# Altium PCB acionadorIncendio.PcbDoc
Units mm, origin at the board's own origin, x right, y up, seen from the top; angles counter-clockwise.
Board outline 80 x 47 mm, 2 copper layers (Top Layer, Bottom Layer); 23 components, 16 nets, 60 pads, 71 vias.
Unrouted connection lines stored in the file: 5.
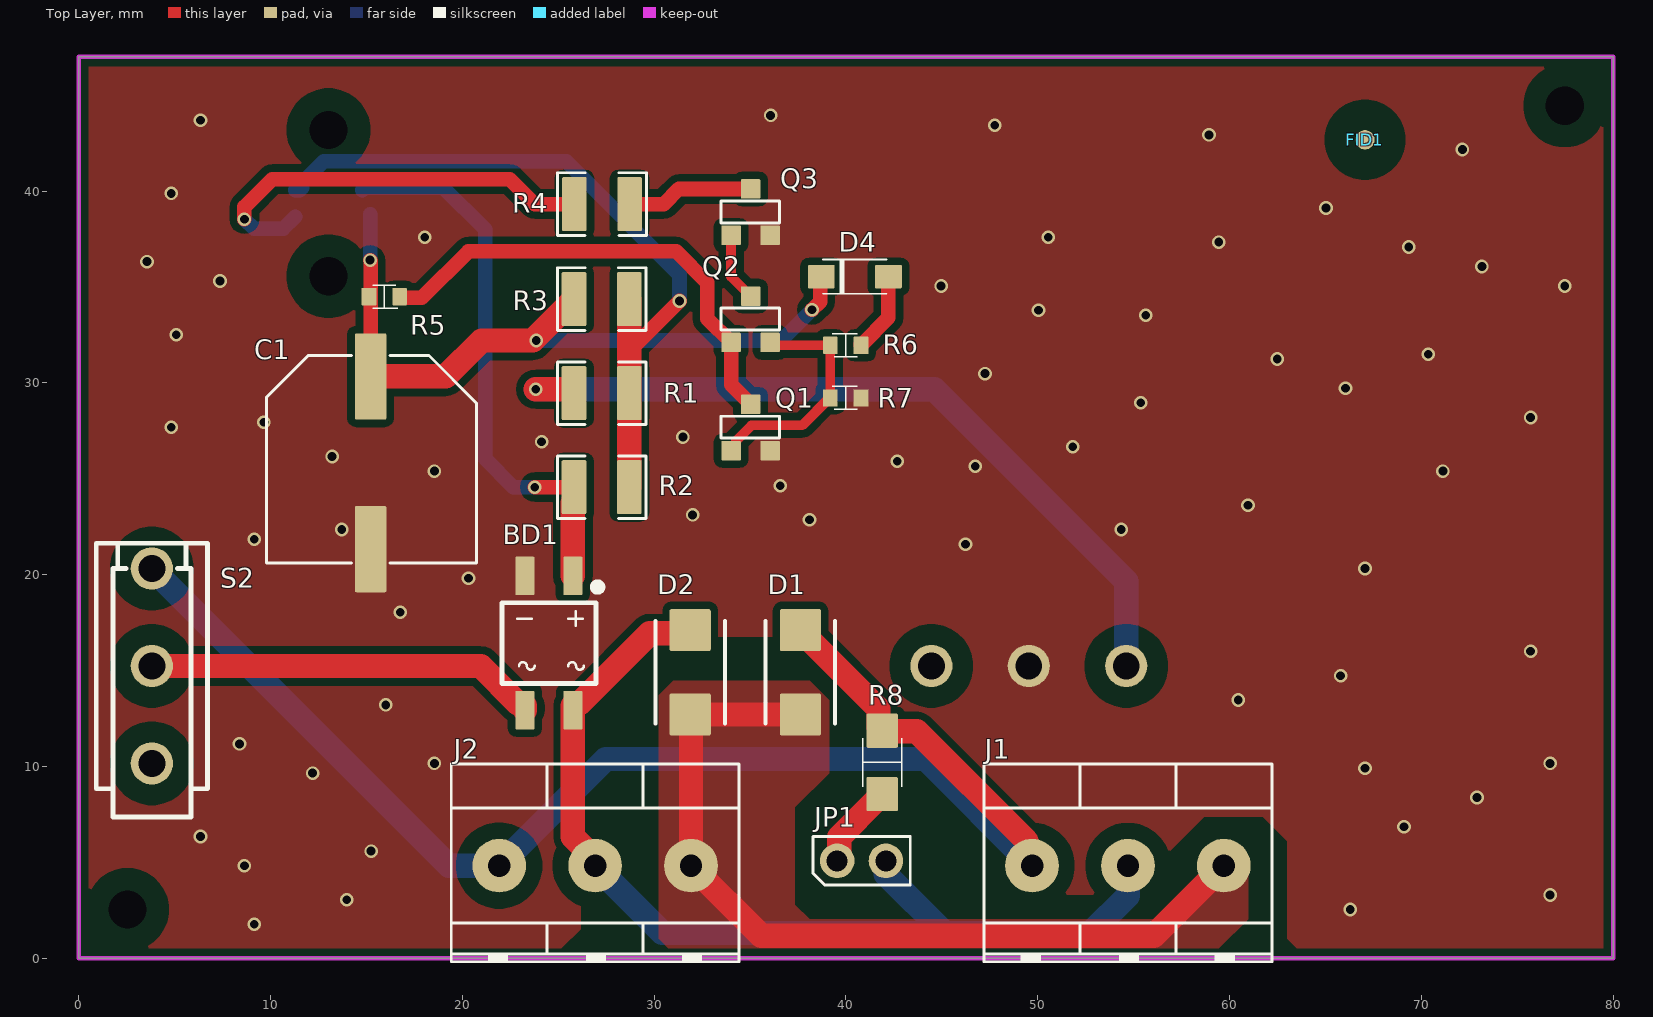
[diagram p0: Top Layer view]
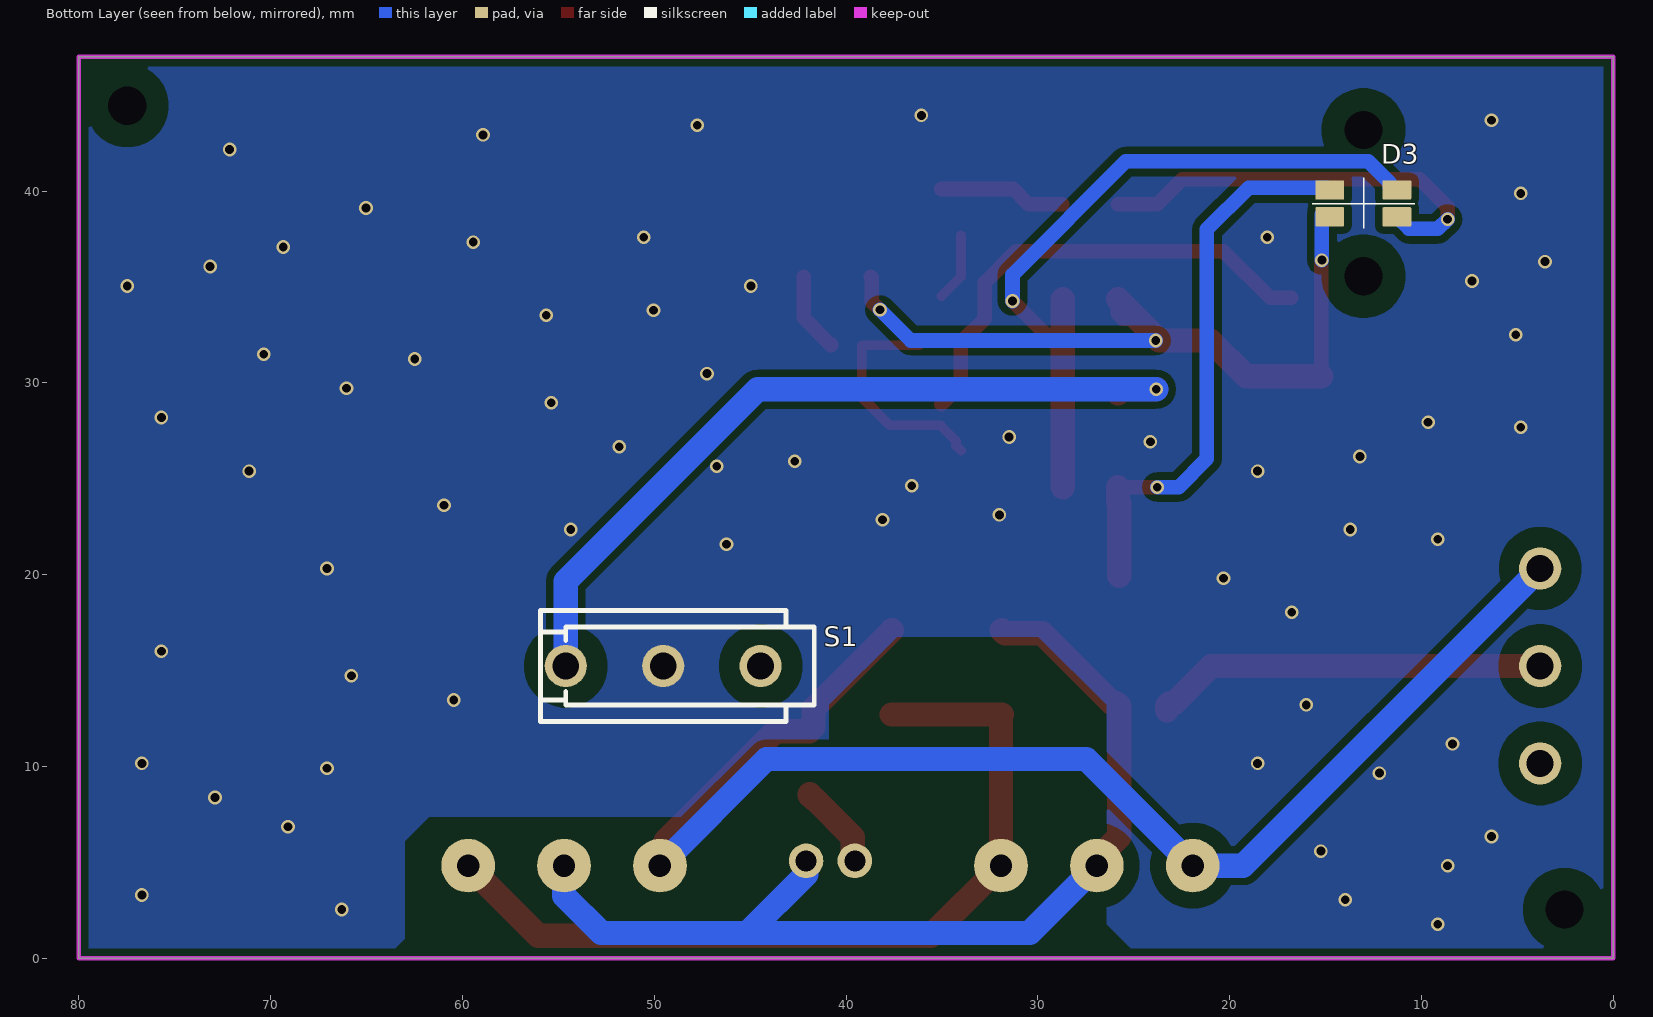
[diagram p1: Bottom Layer view, seen from below]

## Layer stack, top to bottom
Top Solder: solder mask 0.0102, Solder Resist, Dk 3.5
Top Layer: signal copper 0.0356
Dielectric 1: dielectric 0.32, FR-4, Dk 4.8
Bottom Layer: signal copper 0.0356
Bottom Solder: solder mask 0.0102, Solder Resist, Dk 3.5

## Board outline
0,0 0,47 80,47 80,0

## Design rules (kind name [scope] priority, off if disabled: settings)
Clearance Clearance_2 [InNamedPolygon('GND_L02_P004') Or  InNamedPolygon('Top Layer-EARTH')] p1: gap=0.381 ignorepadtopadclearanceinfootprint=FALSE
Clearance Clearance_1 [InNamedPolygon('Top Layer-GND')] p2: gap=0.381 ignorepadtopadclearanceinfootprint=FALSE
Clearance [All] p3: gap=0.254 ignorepadtopadclearanceinfootprint=FALSE except(0: Arc-Text Track-Text SMDPad-Text THPad-Text Via-Text Fill-Text Poly-Text Region-Text Text-Text)
MinimumSolderMaskSliver [All] p1: minsoldermaskwidth=0
PolygonConnect PolygonConnect_3 [All vs IsNamedPolygon('GND_L02_P004')] p1: connectstyle=Direct reliefconductorwidth=0.254 reliefentries=4 polygonreliefangle="90 Angle" airgapwidth=0.254
PolygonConnect PolygonConnect_2 [All vs IsNamedPolygon('Top Layer-GND')] p2: connectstyle=Direct reliefconductorwidth=0.254 reliefentries=4 polygonreliefangle="90 Angle" airgapwidth=0.254
PolygonConnect PolygonConnect_1 [All vs IsNamedPolygon('Top Layer-EARTH')] p3: connectstyle=Direct reliefconductorwidth=0.254 reliefentries=4 polygonreliefangle="90 Angle" airgapwidth=0.254
PolygonConnect [All] p4: connectstyle=Relief reliefconductorwidth=0.254 reliefentries=4 polygonreliefangle="90 Angle" airgapwidth=0.254
RoutingVias [All] p1: holewidth=0.711 width=1.27 viastyle="Through Hole" minholewidth=0.711 minwidth=1.27 maxholewidth=0.711 maxwidth=1.27
SilkToSilkClearance [All] p1: silktosilkclearance=0
SilkToSolderMaskClearance [IsPad] p1: minsilkscreentomaskgap=0 clearancetoexposedcopper=TRUE
SolderMaskExpansion [All] p1: expansion=0.102
Width [All] p1: maxlimit=2.54 minlimit=0.254 preferedwidth=0.254 minimp=50.000000 maximp=50.000000 favimp=50.000000
27 further rules are at their usual default settings.

## Components (designator, comment, footprint, x,y, rotation, side; value= is the part's Value field where it differs from the comment)
BD1 "MB6S" DIO-BG-SMD_4P-L4.7-W4.0-P2.50-LS7.0-TL 24.511,16.434 r270 top
C1 "470uF/10V" CAP-SMD_BD10.0-L10.3-W10.3-LS11.3-FD 15.215,25.832 r270 top
D1 "SMBJ24CA" SMBJ50CA 37.623,14.91 r270 top
D2 "SMBJ24CA" SMBJ50CA 31.877,14.91 r270 top
D3 "BURMG57W-05" BURMG57W 11.28,40.056 r0 bottom locked
D4 "MMSZ5235B" SOD-123-2 40.462,35.535 r0 top
FID1 "MEC_FIDUCIAL_1" Fiducial_1 67.056,42.672 r90 top (schematic designator FID3)
J1 "BORNE" BORNE3 49.7,4.83 r0 top locked
J2 "BORNE" BORNE3 21.92,4.83 r0 top locked
JP1 "JUMPER" HEADER1X2 42.08,5.08 r0 top locked
Q1 "BC847B" SOT-23 35.027,27.61 r0 top
Q2 "S9015" SOT-23 35.027,33.249 r0 top
Q3 "S9015" SOT-23 35.027,38.837 r0 top
R1 "1K1-1210-5%" 1210-RES 27.261,29.464 r180 top
R2 "2K2-1210-5%" 1210-RES 27.261,24.562 r0 top
R3 "68K-1210-5%" 1210-RES 27.261,34.366 r180 top
R4 "240R-1210-5%" 1210-RES 27.28,39.319 r0 top
R5 "330K-0603-5%" 0603-RES 15.926,34.493 r0 top
R6 "68K-0603-5%" 0603-RES 39.98,31.953 r180 top
R7 "330K-0603-5%" 0603-RES 39.98,29.21 r180 top
R8 "4K7-1206-5%" 1206-RES 41.885,10.211 r90 top
S1 "D2F-L3-A" D2F-L3-A 49.53,15.24 r180 bottom locked
S2 "D2F-L3" D2F-L3 3.81,15.24 r270 top locked

## Footprints (in the part's own frame and the unit in brackets; to place one, negate y for a bottom-side part, rotate by r counter-clockwise, add the part's x,y. Pads: shape width x height; smd on the part's side, far side on the other; paste and mask are expansions set on the pad)
0603-RES [mm]
  rrect10% 0.79x0.9 smd: 1(-0.8,0)
  rrect10% 0.75x0.9 smd: 2(0.8,0)
  silkscreen extent -0.6,-0.6 0.7,0.6, body extent -0.81,-0.41 0.79,0.39, height 0.45
1206-RES [mil]
  rrect10% 70x65 smd: 1(-65,0) 2(65,0)
  silkscreen extent -50,-40 50,40, body extent -63,-32 63,31, height 39
1210-RES [mm]
  rrect10% 1.283x2.808 smd paste-100 mask+0.051: 1(-1.441,0) 2(1.441,0)
  silkscreen extent -2.31,-1.63 2.31,1.63, body extent -1.57,-1.27 1.63,1.23, height 0.6
BORNE3 [mm]
  round 2.8 hole 1.168: 1(0,0) 2(5,0) 3(10,0)
  silkscreen extent -2.5,-5.03 12.5,5.3, body extent -2.6,-4.8 13,5.4, height 14.2
BURMG57W [mm]
  rrect10% 1.5x1 smd paste+0 mask+0.051: 1(3.5,0) 2(0,0) 3(3.5,1.4) 4(0,1.4)
  silkscreen extent -0.94,-0.64 4.42,2.01, body extent -0.03,-0.66 3.17,2.04, height 0.54
CAP-SMD_BD10.0-L10.3-W10.3-LS11.3-FD [mm]
  rrect10% 4.5x1.65 smd paste+0 mask+0.051: 1(-4.5,0) 2(4.5,0)
  silkscreen extent -5.59,-5.44 5.23,5.51, body extent -6.13,-5.25 6.07,5.25, height 10.51
D2F-L3 [mm]
  round 2.2 hole 1.4 paste+0 mask+0.051: 1(-5.08,0) 2(0,0) 3(5.08,0)
  silkscreen extent -6.4,-2.9 7.87,2.9, body extent -9.94,-2.88 6.38,2.82, height 12.8
D2F-L3-A [mm]
  round 2.2 hole 1.4 paste+0 mask+0.051: 1(-5.08,0) 2(0,0) 3(5.08,0)
  silkscreen extent -6.4,-2.9 7.87,2.9, body extent -6.38,-0.28 9.94,15.14, height 5.75
DIO-BG-SMD_4P-L4.7-W4.0-P2.50-LS7.0-TL [mm]
  rrect10% 2x1 smd paste+0 mask+0.051: 1(-3.5,1.25) 2(-3.5,-1.25) 3(3.5,-1.25) 4(3.5,1.25)
  silkscreen extent -3.12,-2.45 2.1,2.74, body extent -3.5,-2.35 3.5,2.35, height 2.7
Fiducial_1 [mil] "Ponto Fiducuial"
  round 40 smd paste-20 mask+39.37: 0(0,0)
HEADER1X2 [mm]
  round 1.8 hole 1.1: 1(-2.54,0) 2(0,0)
  silkscreen extent -3.81,-1.27 1.27,1.27, body extent -3.81,-1.27 1.27,1.27, height 17
SMBJ50CA [mm]
  rrect10% 2.2x2.15 smd paste+0 mask+0.051: 1(-2.2,0) 2(2.2,0)
  silkscreen extent -2.67,-1.81 2.67,1.81, body extent -2.65,-1.8 2.65,1.75, height 2.15
SOD-123-2 [mm]
  rrect10% 1.4x1.22 smd paste+0 mask+0.051: 1(-1.75,0) 2(1.75,0)
  silkscreen extent -1.65,-0.89 1.65,0.89, body extent -1.88,-0.77 1.82,0.78, height 1.19
SOT-23 [mil]
  rrect10% 40x40 smd: 1(-40,-45) 2(40,-45) 3(0,50)
  silkscreen extent -60,-20 60,26, body extent -59,-48 59,50, height 43

## Part data
BD1: "PONTE RETIFICADORA MB6S"
C1: library part CAP470UF, "CAPACITOR ELETROLITICO 470UF 10V SMD"
D3: "LED BURMG57W-05"
D4: "DIODO ZENER MMSZ5235B"
FID1: library part FIDUCIAL, Cуdigo Rossi=NC
J1 J2: library part BORNE3, "BORNE 3 VIAS"
JP1: library part HEADER_1X2, "BARRA PINOS 2 PINOS 180 P-2.5MM / CAPA MINI JUMPER MKBL 020B", Code="554 / 515", Descriзгo="BARRA PINOS 2 PINOS 180 P-2.5MM / CAPA MINI JUMPER MKBL 020B"
Q1: "TRANSISTOR BC847B SOT-23-3 SMD"
Q2 Q3: "TRANSISTOR PNP S9015 SOT23-3 SMD"
R1: library part RES1K1_1210, "RESISTOR 1K1 1210 5%"
R2: library part RES2K2_1210, "RESISTOR 2K2 1210 5%"
R3: library part RES68K_1210, "RESISTOR 68K 1210 5%"
R4: library part RES240R_1210, "RESISTOR 240R 1210 5%"
R5 R7: library part RES330K_0603, "RESISTOR 330K 0603 5%"
R6: library part RES68K_0603, "RESISTOR 68K 0603 5%"
R8: library part RES4K7_1206, "RESISTOR 4K7 1206 5%"
S1: "CHAVE INTERRUPTOR D2F-L3-A"
S2: "CHAVE INTERRUPTOR D2F-L3"

## Free pads (board coordinates)
  round 0 hole 2 unplated: D(2.54,2.54) D(13.02,35.56) D(13.02,43.18) D(77.47,44.45)

## Via types
v1: diameter 0.711, hole 0.457, Top Layer to Bottom Layer, tented both sides, 71 vias

## Nets (pads, with @x,y where several pads share a name; then routed paths per layer and width w, separated by ;. In a path a pad name is that pad's centre, name@x,y a point inside that pad or via, vN(x,y) a via of type N, cw(c..) or ccw(c..) an arc to the next point about the centre after c; other vN are vias at no path point)
EARTH: D1.2 D2.2 J1.3 J2.3 | length 44.5
  Top Layer w1.27: D1.2 D2.2 31.92,12.667 J2.3 35.582,1.168 56.038,1.168 J1.3
GND: BD1.2 C1.2 Q1.2 Q3.2 R7.1 S1.2
  other v1: 9.144,1.778 66.294,2.54 13.97,3.048 76.708,3.302 8.636,4.826 15.24,5.588 6.35,6.35 69.088,6.858 72.898,8.382 12.192,9.652 67.056,9.906 18.542,10.16 76.708,10.16 8.382,11.176 16.002,13.208 60.452,13.462 65.786,14.732 75.692,16.002 16.764,18.034 20.32,19.812 67.056,20.32 46.228,21.59 9.144,21.844 13.716,22.352 54.356,22.352 38.1,22.86 32.004,23.114 60.96,23.622 36.576,24.638 18.542,25.4 71.12,25.4 46.736,25.654 42.672,25.908 13.208,26.162 51.816,26.67 24.13,26.924 31.496,27.178 4.826,27.686 9.652,27.94 75.692,28.194 55.372,28.956 66.04,29.718 47.244,30.48 62.484,31.242 70.358,31.496 5.08,32.512 55.626,33.528 50.038,33.782 44.958,35.052 77.47,35.052 7.366,35.306 73.152,36.068 3.556,36.322 69.342,37.084 59.436,37.338 18.034,37.592 50.546,37.592 65.024,39.116 4.826,39.878 72.136,42.164 58.928,42.926 47.752,43.434 6.35,43.688 36.068,43.942
NetBD1_1: BD1.1 D3.1 R2.1 | length 29.2
  Top Layer w0.762: v1(23.774,24.562) R2.1
  Top Layer w1.27: BD1.1 25.761,23.74 25.819,23.799 R2.1
  Bottom Layer w0.762: D3.1 14.894,40.17 19.012,40.17 21.184,37.998 21.184,26.035 22.657,24.562 v1(23.774,24.562)
NetBD1_3: BD1.3 S2.2 | length 20.5
  Top Layer w1.27: S2.2 20.955,15.24 22.896,13.299 23.126,13.299 23.261,13.164 BD1.3
NetBD1_4: BD1.4 D2.1 J1.2 J2.2 JP1.2 | length 53.2
  Top Layer w1.27: J2.2 26.92,5.18 25.761,6.339 BD1.4 25.761,13.164 25.896,13.299 26.126,13.299 29.774,16.947 31.714,16.947 D2.1
  Bottom Layer w1.27: J2.2 30.429,1.321 45.136,1.321 ; JP1.2 42.08,4.377 45.136,1.321 ; J1.2 54.7,3.265 52.756,1.321 45.136,1.321
NetC1_1: C1.1 D3.3 D4.1 R3.2 R5.1 | length 41
  Top Layer w0.762: v1(15.189,36.398) 15.215,36.373 15.215,30.338 C1.1 ; v1(23.851,32.207) 24.987,33.343 25.559,33.343 25.819,33.603 R3.2 ; v1(38.227,33.807) 38.65,34.23 38.65,35.472 D4.1
  Top Layer w1.27: C1.1@15.215,30.338 19.136,30.338 21.006,32.207 23.66,32.207 R3.2
  Bottom Layer w0.762: v1(15.189,36.398) D3.3@15.189,38.786 ; v1(23.851,32.207) 36.627,32.207 v1(38.227,33.807)
NetD1_1: D1.1 J1.1 J2.1 R8.2 S2.1 | length 75.2
  Top Layer w1.27: D1.1 37.623,17.085 41.694,13.014 41.694,12.052 R8.2 41.906,11.841 43.684,11.841 49.407,6.117 49.407,5.123 J1.1
  Bottom Layer w1.27: S2.1 19.3,4.83 J2.1 27.479,10.389 44.141,10.389 J1.1
NetD3_2: D3.2 R1.1 R2.2 R3.1 | length 39.1
  Top Layer w0.762: R1.1@28.778,30.683 28.778,31.725 v1(31.318,34.265)
  Top Layer w1.27: R2.2 R1.1 R3.1
  Bottom Layer w0.762: D3.2 11.53,40.056 11.649,40.175 11.649,40.425 12.769,41.545 25.409,41.545 31.318,35.636 v1(31.318,34.265)
NetD3_4: D3.4 R4.1 | length 22.1
  Top Layer w0.762: v1(8.636,38.532) 8.636,39.167 10.084,40.615 22.479,40.615 23.774,39.319 R4.1
  Bottom Layer w0.762: v1(8.636,38.532) 9.144,38.024 10.648,38.024 D3.4
NetD4_2: D4.2 R6.1 | length 4.2
  Top Layer w0.762: R6.1 40.78,32.008 40.794,32.022 40.849,32.022 42.212,33.386 D4.2
NetJP1_1: JP1.1 R8.1 | length 4.5
  Top Layer w1.27: JP1.1 39.641,5.181 39.641,6.317 41.631,8.306 41.694,8.306 41.885,8.496 R8.1
NetQ1_1: Q1.1 Q2.2 R6.2 R7.2 | length 12.4
  Top Layer w0.508: Q1.1 34.265,26.721 34.265,26.975 35.077,27.788 37.719,27.788 39.18,29.248 R6.2 36.195,31.953 Q2.2
NetQ1_3: Q1.3 Q2.1 R5.2 | length 24.9
  Top Layer w0.762: R5.2@16.792,34.427 17.892,34.427 20.32,36.855 31.14,36.855 32.766,35.23 32.766,33.35 Q2.1 34.011,29.896 Q1.3
NetQ2_3: Q2.3 Q3.1 | length 3.6
  Top Layer w0.508: Q3.1 34.011,35.535 Q2.3
NetQ3_3: Q3.3 R4.2 | length 6.6
  Top Layer w0.762: R4.2 30.505,39.319 31.293,40.107 Q3.3
NetR1_2: R1.2 S1.1 | length 41.5
  Top Layer w1.27: v1(23.825,29.667) 25.813,29.667 25.819,29.661 R1.2
  Bottom Layer w1.27: v1(23.825,29.667) 44.602,29.667 54.61,19.66 S1.1
pads on no net: FID1.0 S1.3 S2.3

## Polygon pours and split planes (outlines as drawn)
GND on Top Layer "Top Layer-GND" (solid, remove dead copper, pour order 2): 0,0 24.638,0 26.162,1.524 26.162,11.938 30.988,16.764 38.1,16.764 41.148,13.716 41.148,8.636 38.608,6.096 38.608,5.588 40.894,3.302 54.61,3.302 58.674,7.366 61.722,7.366 62.992,6.096 62.992,1.016 64.008,0 80.01,0 80.01,46.99 0,46.99
EARTH on Top Layer "Top Layer-EARTH" (solid, pour order 0): 30.226,13.716 30.226,1.016 31.242,0 58.928,0 60.96,2.032 60.96,5.334 58.42,5.334 58.42,4.318 56.134,2.032 38.1,2.032 37.338,2.794 37.338,7.874 39.116,9.652 39.116,13.462 38.1,14.478 30.988,14.478
GND on Bottom Layer "GND_L02_P004" (solid, remove dead copper, pour order 4): 0,0 0,46.99 80.01,46.99 80.01,0 64.008,0 62.992,1.016 62.992,6.096 61.722,7.366 58.674,7.366 43.942,7.366 40.894,10.414 40.894,13.208 37.338,16.764 29.972,16.764 26.416,13.208 26.416,1.778 24.638,0

## Keep-outs
Keep-Out Layer:
  the board outline again, w0.254

## Other copper
Top Layer:
  pour cut-out: 64.963,42.672 ccw(c67.056,42.672) 67.056,40.579 ccw(c67.056,42.672) 69.149,42.672 ccw(c67.056,42.672) 67.056,44.765 ccw(c67.056,42.672)
  pour cut-out: 52.462,4.83 ccw(c54.7,4.83) 54.7,2.592 ccw(c54.7,4.83) 56.938,4.83 ccw(c54.7,4.83) 54.7,7.068 ccw(c54.7,4.83)
  pour cut-out: 47.462,4.83 ccw(c49.7,4.83) 49.7,2.592 ccw(c49.7,4.83) 51.938,4.83 ccw(c49.7,4.83) 49.7,7.068 ccw(c49.7,4.83)
  pour cut-out: 19.682,4.83 ccw(c21.92,4.83) 21.92,2.592 ccw(c21.92,4.83) 24.158,4.83 ccw(c21.92,4.83) 21.92,7.068 ccw(c21.92,4.83)
  pour cut-out: 24.682,4.83 ccw(c26.92,4.83) 26.92,2.592 ccw(c26.92,4.83) 29.158,4.83 ccw(c26.92,4.83) 26.92,7.068 ccw(c26.92,4.83)
  pour cut-out: 52.44,15.24 ccw(c54.61,15.24) 54.61,13.07 ccw(c54.61,15.24) 56.78,15.24 ccw(c54.61,15.24) 54.61,17.41 ccw(c54.61,15.24)
  pour cut-out: 42.28,15.24 ccw(c44.45,15.24) 44.45,13.07 ccw(c44.45,15.24) 46.62,15.24 ccw(c44.45,15.24) 44.45,17.41 ccw(c44.45,15.24)
  pour cut-out: 1.64,10.16 ccw(c3.81,10.16) 3.81,7.99 ccw(c3.81,10.16) 5.98,10.16 ccw(c3.81,10.16) 3.81,12.33 ccw(c3.81,10.16)
  pour cut-out: 1.64,15.24 ccw(c3.81,15.24) 3.81,13.07 ccw(c3.81,15.24) 5.98,15.24 ccw(c3.81,15.24) 3.81,17.41 ccw(c3.81,15.24)
  pour cut-out: 1.64,20.32 ccw(c3.81,20.32) 3.81,18.15 ccw(c3.81,20.32) 5.98,20.32 ccw(c3.81,20.32) 3.81,22.49 ccw(c3.81,20.32)
  pour cut-out: 0.37,2.54 ccw(c2.54,2.54) 2.54,0.37 ccw(c2.54,2.54) 4.71,2.54 ccw(c2.54,2.54) 2.54,4.71 ccw(c2.54,2.54)
  pour cut-out: 10.85,35.56 ccw(c13.02,35.56) 13.02,33.39 ccw(c13.02,35.56) 15.19,35.56 ccw(c13.02,35.56) 13.02,37.73 ccw(c13.02,35.56)
  pour cut-out: 10.85,43.18 ccw(c13.02,43.18) 13.02,41.01 ccw(c13.02,43.18) 15.19,43.18 ccw(c13.02,43.18) 13.02,45.35 ccw(c13.02,43.18)
  pour cut-out: 75.3,44.45 ccw(c77.47,44.45) 77.47,42.28 ccw(c77.47,44.45) 79.64,44.45 ccw(c77.47,44.45) 77.47,46.62 ccw(c77.47,44.45)
Bottom Layer:
  pour cut-out: 19.682,4.83 ccw(c21.92,4.83) 21.92,2.592 ccw(c21.92,4.83) 24.158,4.83 ccw(c21.92,4.83) 21.92,7.068 ccw(c21.92,4.83)
  pour cut-out: 52.462,4.83 ccw(c54.7,4.83) 54.7,2.592 ccw(c54.7,4.83) 56.938,4.83 ccw(c54.7,4.83) 54.7,7.068 ccw(c54.7,4.83)
  pour cut-out: 47.462,4.83 ccw(c49.7,4.83) 49.7,2.592 ccw(c49.7,4.83) 51.938,4.83 ccw(c49.7,4.83) 49.7,7.068 ccw(c49.7,4.83)
  pour cut-out: 19.682,4.83 ccw(c21.92,4.83) 21.92,2.592 ccw(c21.92,4.83) 24.158,4.83 ccw(c21.92,4.83) 21.92,7.068 ccw(c21.92,4.83)
  pour cut-out: 37.302,5.08 ccw(c39.54,5.08) 39.54,2.842 ccw(c39.54,5.08) 41.778,5.08 ccw(c39.54,5.08) 39.54,7.318 ccw(c39.54,5.08)
  pour cut-out: 39.842,5.08 ccw(c42.08,5.08) 42.08,2.842 ccw(c42.08,5.08) 44.318,5.08 ccw(c42.08,5.08) 42.08,7.318 ccw(c42.08,5.08)
  pour cut-out: 57.462,4.83 ccw(c59.7,4.83) 59.7,2.592 ccw(c59.7,4.83) 61.938,4.83 ccw(c59.7,4.83) 59.7,7.068 ccw(c59.7,4.83)
  pour cut-out: 52.462,4.83 ccw(c54.7,4.83) 54.7,2.592 ccw(c54.7,4.83) 56.938,4.83 ccw(c54.7,4.83) 54.7,7.068 ccw(c54.7,4.83)
  pour cut-out: 47.462,4.83 ccw(c49.7,4.83) 49.7,2.592 ccw(c49.7,4.83) 51.938,4.83 ccw(c49.7,4.83) 49.7,7.068 ccw(c49.7,4.83)
  pour cut-out: 19.682,4.83 ccw(c21.92,4.83) 21.92,2.592 ccw(c21.92,4.83) 24.158,4.83 ccw(c21.92,4.83) 21.92,7.068 ccw(c21.92,4.83)
  pour cut-out: 24.682,4.83 ccw(c26.92,4.83) 26.92,2.592 ccw(c26.92,4.83) 29.158,4.83 ccw(c26.92,4.83) 26.92,7.068 ccw(c26.92,4.83)
  pour cut-out: 29.682,4.83 ccw(c31.92,4.83) 31.92,2.592 ccw(c31.92,4.83) 34.158,4.83 ccw(c31.92,4.83) 31.92,7.068 ccw(c31.92,4.83)
  pour cut-out: 75.3,44.45 ccw(c77.47,44.45) 77.47,42.28 ccw(c77.47,44.45) 79.64,44.45 ccw(c77.47,44.45) 77.47,46.62 ccw(c77.47,44.45)
  pour cut-out: 52.44,15.24 ccw(c54.61,15.24) 54.61,13.07 ccw(c54.61,15.24) 56.78,15.24 ccw(c54.61,15.24) 54.61,17.41 ccw(c54.61,15.24)
  pour cut-out: 42.28,15.24 ccw(c44.45,15.24) 44.45,13.07 ccw(c44.45,15.24) 46.62,15.24 ccw(c44.45,15.24) 44.45,17.41 ccw(c44.45,15.24)
  pour cut-out: 1.64,20.32 ccw(c3.81,20.32) 3.81,18.15 ccw(c3.81,20.32) 5.98,20.32 ccw(c3.81,20.32) 3.81,22.49 ccw(c3.81,20.32)
  pour cut-out: 1.64,15.24 ccw(c3.81,15.24) 3.81,13.07 ccw(c3.81,15.24) 5.98,15.24 ccw(c3.81,15.24) 3.81,17.41 ccw(c3.81,15.24)
  pour cut-out: 1.64,10.16 ccw(c3.81,10.16) 3.81,7.99 ccw(c3.81,10.16) 5.98,10.16 ccw(c3.81,10.16) 3.81,12.33 ccw(c3.81,10.16)
  pour cut-out: 0.37,2.54 ccw(c2.54,2.54) 2.54,0.37 ccw(c2.54,2.54) 4.71,2.54 ccw(c2.54,2.54) 2.54,4.71 ccw(c2.54,2.54)
  pour cut-out: 10.85,35.56 ccw(c13.02,35.56) 13.02,33.39 ccw(c13.02,35.56) 15.19,35.56 ccw(c13.02,35.56) 13.02,37.73 ccw(c13.02,35.56)
  pour cut-out: 10.85,43.18 ccw(c13.02,43.18) 13.02,41.01 ccw(c13.02,43.18) 15.19,43.18 ccw(c13.02,43.18) 13.02,45.35 ccw(c13.02,43.18)